# Altium PCB PCB.PcbDoc
Units mil, origin at the board's own origin, x right, y up, seen from the top; angles counter-clockwise.
Board outline 8629.96 x 1582.71 mil, 2 copper layers (Top Layer, Bottom Layer), stack 60.433 mil thick; 94 components, 71 nets, 454 pads, 92 vias.
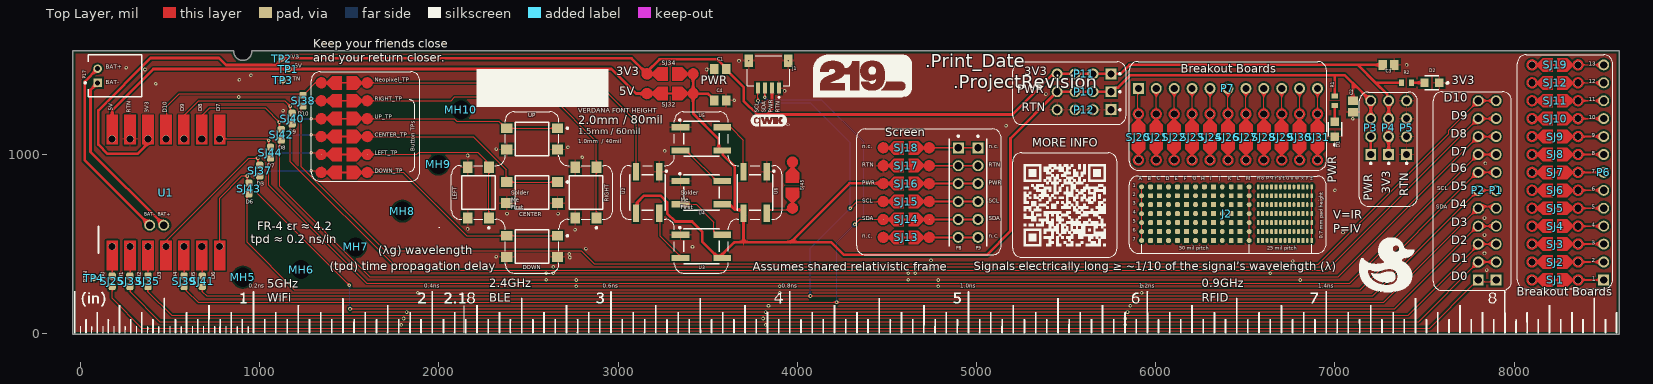
[diagram p0: Top Layer view]
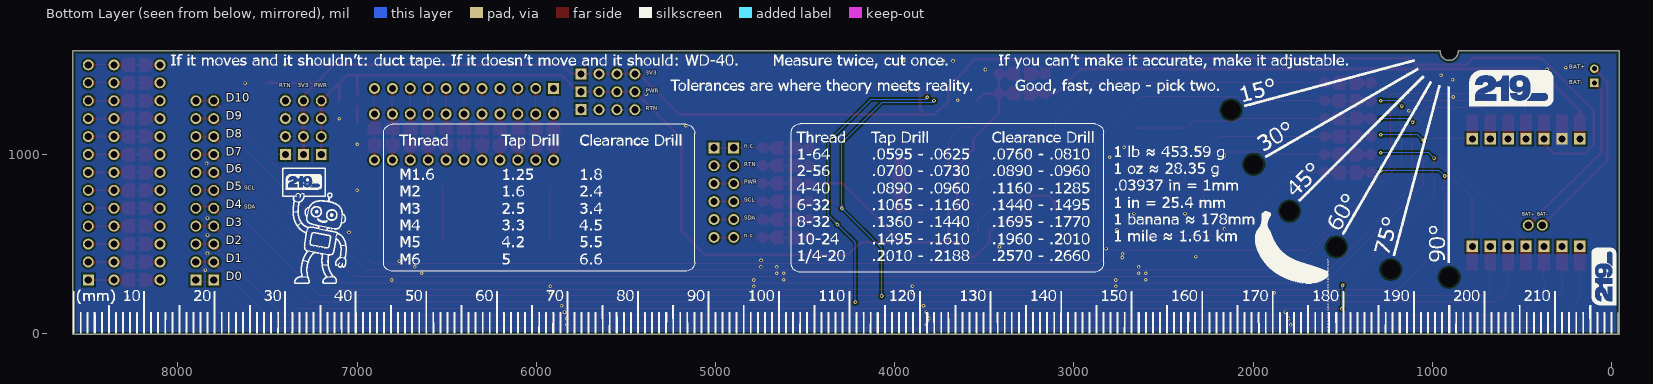
[diagram p1: Bottom Layer view, seen from below]

## Layer stack, top to bottom
Top Solder: solder mask 1.1811, Solder Resist, Dk 4
Top Layer: signal copper 0.689
Dielectric 3: core 59.0551, Dk 4.2
Bottom Layer: signal copper 0.689
Bottom Solder: solder mask 1.1811, Solder Resist, Dk 4

## Board outline
-43.32,0.03 -43.32,1574.8 cw(c-39.37,1574.8) -39.37,1578.75 851.38,1578.75 cw(c851.38,1574.8) 855.33,1574.8 ccw(c905.52,1574.8) 955.7,1574.8 cw(c959.65,1574.8) 959.71,1578.75 8582.65,1578.76 cw(c8582.68,1574.8) 8586.63,1574.8 8586.63,0 cw(c8582.68,0) 8582.68,-3.95 -39.37,-3.95 cw(c-39.37,0)

## Design rules (kind name [scope] priority, off if disabled: settings)
AssemblyTestPointUsage [InNetClass('All Nets')] p1 off:
AssemblyTestpoint [(IsPad And (OnTopLayer Or OnBottomLayer)) Or (IsVia) Or (IsPad And OnMultiLayer)] p1 off: testpointundercomponent=FALSE minsize=40 maxsize=100 preferedsize=50 minholesize=0 maxholesize=75 preferedholesize=35 testpointgrid=100 usegrid=TRUE gridoriginx=1000 gridoriginy=1000 gridtolerance=0.01 allowsidetop=TRUE allowsidebottom=TRUE
BoardOutlineClearance BoardOutlineClearance_nosilk [All And Not OnLayer('Top Overlay') And Not OnLayer('Bottom Overlay')] p1: gap=15 ignorepadtopadclearanceinfootprint=FALSE
Clearance Clearance_analog [InNetClass('Analog')] p1: gap=5 ignorepadtopadclearanceinfootprint=FALSE
Clearance Clearance_digital [InNetClass('Digital')] p2: gap=5 ignorepadtopadclearanceinfootprint=FALSE
Clearance Clearance_polygon [InPolygon] p3: gap=10 ignorepadtopadclearanceinfootprint=FALSE
Clearance Clearance_Vias_to_Pads [(IsVia) vs (IsPad)] p4: gap=10 ignorepadtopadclearanceinfootprint=FALSE
Clearance [All] p5: gap=5 ignorepadtopadclearanceinfootprint=FALSE
DiffPairsRouting [All] p1: maxlimit=100 minlimit=6 mostfreqgap=10 toplayer_minwidth=6 toplayer_maxwidth=100 toplayer_prefwidth=10 bottomlayer_minwidth=6 bottomlayer_maxwidth=100 bottomlayer_prefwidth=10 maxuncoupledlength=500
FabricationTestPointUsage TestPointUsage [InNetClass('All Nets')] p1 off: valid=0 allowmultiple=FALSE
FabricationTestpoint Testpoint [(IsPad And (OnTopLayer Or OnBottomLayer)) Or (IsVia) Or (IsPad And OnMultiLayer)] p1 off: side=3 testpointundercomponent=TRUE minsize=30 maxsize=100 preferedsize=60 minholesize=0 maxholesize=50 preferedholesize=32 testpointgrid=25 allowsidetop=TRUE allowsidebottom=TRUE usegrid=TRUE gridoriginx=1000 gridoriginy=1000 gridtolerance=0.01
Height [All] p1 off: minheight=0 maxheight=1000 prefheight=500
HoleSize [All] p1: absolutevalues=TRUE maxlimit=500 minlimit=8 maxpercent=80.000 minpercent=20.000
MinimumAnnularRing [All] p1: minimumring=5
MinimumSolderMaskSliver [All] p1 off: minsoldermaskwidth=5
PasteMaskExpansion [All] p1: expansion=-1
PermittedLayers [All] p1: toplayerpermitted=TRUE bottomlayerpermitted=TRUE
PolygonConnect PolygonConnect_Via [All vs IsVia] p1: connectstyle=Direct reliefconductorwidth=10 reliefentries=4 polygonreliefangle="90 Angle" airgapwidth=10
PolygonConnect [All] p2: connectstyle=Relief reliefconductorwidth=10 reliefentries=4 polygonreliefangle="90 Angle" airgapwidth=10
RoutingVias [All] p1: holewidth=12 width=22 viastyle="Through Hole" minholewidth=8 minwidth=18 maxholewidth=500 maxwidth=700
SilkToSilkClearance [All] p1 off: silktosilkclearance=1
SilkToSolderMaskClearance SilkscreenOverComponentPads [IsPad] p1: minsilkscreentomaskgap=3 clearancetoexposedcopper=TRUE
SolderMaskExpansion SolderMaskExpansion_RequireTentedVias [IsVia] p1: expansion=4 istentingtop=TRUE
SolderMaskExpansion [All] p2 off: expansion=1 istentingtop=FALSE
SupplyNets "Schematic Supply Nets_2" [InNet('PWR')] p1: voltage=0.000
SupplyNets "Schematic Supply Nets_3" [InNet('RTN')] p2: voltage=0.000
SupplyNets "Schematic Supply Nets_1" [InNet('3V3')] p3: voltage=0.000
SupplyNets "Schematic Supply Nets" [InNet('5V')] p4: voltage=0.000
UnRoutedNet [All] p1: checkbadconnections=TRUE
UnpouredPolygon [All] p1: allowunpoured=TRUE allowshelved=TRUE
Width [All] p1: maxlimit=1000 minlimit=5 preferedwidth=6 checkconnectedcopper=TRUE
17 further rules are at their usual default settings.

## Classes and differential pairs
component class U_Main: C1 C2 C3 C4 CENTER CENTER_TP D1 D2 DOWN DOWN_TP J1 J2 LEFT LEFT_TP Neopixel_TP P1 P2 P3 P4 P5 P6 P7 P8 P9 P10 P11 P12 P17 R1 R2 RIGHT RIGHT_TP SJ1 SJ2 SJ3 SJ4 SJ5 SJ6 SJ7 SJ8 SJ9 SJ10 SJ11 SJ12 SJ13 SJ14 SJ15 SJ16 SJ17 SJ18 SJ19 SJ20 SJ21 SJ22 SJ23 SJ24 SJ25 SJ26 SJ27 SJ28 SJ29 SJ30 SJ31 SJ32 SJ33 SJ34 SJ35 SJ37 SJ38 SJ39 SJ40 SJ41 SJ42 SJ43 SJ44 SJ45 TP1 TP2 TP3 TP4 U1 U2 U3 U4 U5 U6 UP UP_TP
component class U_Top: MH5 MH6 MH7 MH8 MH9 MH10

## Components (designator, comment, footprint, x,y, rotation, side; value= is the part's Value field where it differs from the comment)
C1 "Multilayer Ceramic Capacitor, 1 uF, 50 V, ± 10%, X7R, 0805" FP-GRM21B-0_15-IPC_B 3570.06,1477.49 r180 top value=1uF
C2 "Multilayer Ceramic Capacitor, 1 uF, 50 V, ± 10%, X7R, 0805" FP-GRM21B-0_15-IPC_B 7100,1267.47 r270 top value=1uF
C3 "Multilayer Ceramic Capacitor, 1 uF, 50 V, ± 10%, X7R, 0805" FP-GRM21B-0_15-IPC_B 7300,1500 r0 top value=1uF
C4 "Multilayer Ceramic Capacitor, 1 uF, 50 V, ± 10%, X7R, 0805" FP-GRM21B-0_15-IPC_B 3570.06,1302.45 r0 top value=1uF
CENTER "TL3305AF260QG" FP-TL3305AF260QG-MFG 2519.68,787.4 r180 top
CENTER_TP "SJ CUSTOM SMD NC" "SJ CUSTOM SMD NC" 1471.63,1100 r0 top net-tie
D1 "LSR976-NR-1" FP-LS_R976-MFG 7000,1141.34 r90 top
D2 "LYR976-PS-36" FP-LS_R976-MFG 7541.34,1400 r180 top
DOWN "TL3305AF260QG" FP-TL3305AF260QG-MFG 2519.68,487.4 r180 top
DOWN_TP "SJ CUSTOM SMD NC" "SJ CUSTOM SMD NC" 1471.63,900 r0 top net-tie
J1 "QWIIC JST CONNECTOR" SPARKFUN_PRT-14417 3839.06,1466.46 r180 top
J2 "ProtoPads" "New footprint 1" 5921.45,819.75 r0 top
LEFT "TL3305AF260QG" FP-TL3305AF260QG-MFG 2219.68,787.4 r90 top
LEFT_TP "SJ CUSTOM SMD NC" "SJ CUSTOM SMD NC" 1471.63,1000 r0 top net-tie
MH5 "2.7mm hole" "2.7mm hole (no keepout)" 905.53,314.97 r0 top locked
MH6 "2.7mm hole" "2.7mm hole (no keepout)" 1231.51,357.88 r0 top locked
MH7 "2.7mm hole" "2.7mm hole (no keepout)" 1535.45,483.87 r0 top locked
MH8 "2.7mm hole" "2.7mm hole (no keepout)" 1796.47,683.87 r0 top locked
MH9 "2.7mm hole" "2.7mm hole (no keepout)" 1996.47,944.89 r0 top locked
MH10 "2.7mm hole" "2.7mm hole (no keepout)" 2122.46,1248.83 r0 top locked
Neopixel_TP "SJ CUSTOM SMD NC" "SJ CUSTOM SMD NC" 1471.63,1400 r0 top net-tie
P1 "HDR 11 POS 100mil 2.54mm" "HDR 11 POS 100mil 2.54mm no outline" 7900,300 r90 top
P2 "HDR 11 POS 100mil 2.54mm" "HDR 11 POS 100mil 2.54mm no outline" 7800,300 r90 top
P3 "HDR 04 POS 100mil 2.54mm" "HDR 04 POS 100mil 2.54mm - No Outline" 7200,1000 r90 top
P4 "HDR 04 POS 100mil 2.54mm" "HDR 04 POS 100mil 2.54mm - No Outline" 7300,1000 r90 top
P5 "HDR 04 POS 100mil 2.54mm" "HDR 04 POS 100mil 2.54mm - No Outline" 7400,1000 r90 top
P6 "HDR 13 POS 100mil 2.54mm" "HDR 13 POS 100mil 2.54mm No Outline" 8500,300 r90 top
P7 "HDR 11 POS 100mil 2.54mm" "HDR 11 POS 100mil 2.54mm no outline" 5903.18,1368.79 r0 top
P8 "HDR 06 POS 100mil 2.54mm" "HDR 06 POS 100mil 2.54mm" 4898.43,1037.4 r270 top
P9 "HDR 06 POS 100mil 2.54mm" "HDR 06 POS 100mil 2.54mm" 5008.27,1037.4 r270 top
P10 "HDR 04 POS 100mil 2.54mm" "HDR 04 POS 100mil 2.54mm - No Outline" 5750,1350 r180 top
P11 "HDR 04 POS 100mil 2.54mm" "HDR 04 POS 100mil 2.54mm - No Outline" 5750,1450 r180 top
P12 "HDR 04 POS 100mil 2.54mm" "HDR 04 POS 100mil 2.54mm - No Outline" 5750,1250 r180 top
P17 "S2B-PH-K-S(LF)(SN)" JST-S2B-PH-K-S_V 191.94,1439.47 r90 top
R1 "SMD Chip Resistor, 330 Ohm, ± 1%, 100 mW, 0603" RESC1608X55X25NL10T15 7000,1300 r270 top value=330R
R2 "SMD Chip Resistor, 330 Ohm, ± 1%, 100 mW, 0603" RESC1608X55X25NL10T15 7400,1400 r0 top value=330R
RIGHT "TL3305AF260QG" FP-TL3305AF260QG-MFG 2819.68,787.4 r90 top
RIGHT_TP "SJ CUSTOM SMD NC" "SJ CUSTOM SMD NC" 1471.63,1300 r0 top net-tie
SJ1 "SJ CUSTOM and TH NC" "SJ CUSTOM and TH NC" 8228.37,300 r0 top net-tie
SJ2 "SJ CUSTOM and TH NC" "SJ CUSTOM and TH NC" 8228.37,400 r0 top net-tie
SJ3 "SJ CUSTOM and TH NC" "SJ CUSTOM and TH NC" 8228.37,500 r0 top net-tie
SJ4 "SJ CUSTOM and TH NC" "SJ CUSTOM and TH NC" 8228.37,600 r0 top net-tie
SJ5 "SJ CUSTOM and TH NC" "SJ CUSTOM and TH NC" 8228.37,700 r0 top net-tie
SJ6 "SJ CUSTOM and TH NC" "SJ CUSTOM and TH NC" 8228.37,800 r0 top net-tie
SJ7 "SJ CUSTOM and TH NC" "SJ CUSTOM and TH NC" 8228.37,900 r0 top net-tie
SJ8 "SJ CUSTOM and TH NC" "SJ CUSTOM and TH NC" 8228.37,1000 r0 top net-tie
SJ9 "SJ CUSTOM and TH NC" "SJ CUSTOM and TH NC" 8228.37,1100 r0 top net-tie
SJ10 "SJ CUSTOM and TH NC" "SJ CUSTOM and TH NC" 8228.37,1200 r0 top net-tie
SJ11 "SJ CUSTOM and TH NC" "SJ CUSTOM and TH NC" 8228.37,1300 r0 top net-tie
SJ12 "SJ CUSTOM and TH NC" "SJ CUSTOM and TH NC" 8228.37,1400.01 r0 top net-tie
SJ13 "SJ CUSTOM SMD NC" "SJ CUSTOM SMD NC" 4607.87,537.4 r0 top net-tie
SJ14 "SJ CUSTOM SMD NC" "SJ CUSTOM SMD NC" 4607.87,637.4 r0 top net-tie
SJ15 "SJ CUSTOM SMD NC" "SJ CUSTOM SMD NC" 4607.87,737.4 r0 top net-tie
SJ16 "SJ CUSTOM SMD NC" "SJ CUSTOM SMD NC" 4607.87,837.4 r0 top net-tie
SJ17 "SJ CUSTOM SMD NC" "SJ CUSTOM SMD NC" 4607.87,937.4 r0 top net-tie
SJ18 "SJ CUSTOM SMD NC" "SJ CUSTOM SMD NC" 4607.87,1037.4 r0 top net-tie
SJ19 "SJ CUSTOM and TH NC" "SJ CUSTOM and TH NC" 8228.37,1500.01 r0 top net-tie
SJ20 "SJ CUSTOM and TH NC" "SJ CUSTOM and TH NC" 5903.18,1097.15 r90 top net-tie
SJ21 "SJ CUSTOM and TH NC" "SJ CUSTOM and TH NC" 6003.18,1097.15 r90 top net-tie
SJ22 "SJ CUSTOM and TH NC" "SJ CUSTOM and TH NC" 6103.18,1097.15 r90 top net-tie
SJ23 "SJ CUSTOM and TH NC" "SJ CUSTOM and TH NC" 6203.18,1097.15 r90 top net-tie
SJ24 "SJ CUSTOM and TH NC" "SJ CUSTOM and TH NC" 6303.18,1097.15 r90 top net-tie
SJ25 "Solder Jumper 0603 Normally Closed" "SolderJumper SPST NC 0603" 177.47,292.56 r90 top net-tie
SJ26 "SJ CUSTOM and TH NC" "SJ CUSTOM and TH NC" 6403.18,1097.15 r90 top net-tie
SJ27 "SJ CUSTOM and TH NC" "SJ CUSTOM and TH NC" 6503.18,1097.15 r90 top net-tie
SJ28 "SJ CUSTOM and TH NC" "SJ CUSTOM and TH NC" 6603.18,1097.15 r90 top net-tie
SJ29 "SJ CUSTOM and TH NC" "SJ CUSTOM and TH NC" 6703.18,1097.15 r90 top net-tie
SJ30 "SJ CUSTOM and TH NC" "SJ CUSTOM and TH NC" 6803.18,1097.15 r90 top net-tie
SJ31 "SJ CUSTOM and TH NC" "SJ CUSTOM and TH NC" 6903.18,1097.15 r90 top net-tie
SJ32 "SJ CUSTOM SMD NC" "SJ CUSTOM SMD NC" 3290,1340 r0 top net-tie
SJ33 "Solder Jumper 0603 Normally Closed" "SolderJumper SPST NC 0603" 276,292.56 r90 top net-tie
SJ34 "SJ CUSTOM SMD NO" "SJ CUSTOM SMD NO"#1 3290,1450 r180 top net-tie
SJ35 "Solder Jumper 0603 Normally Closed" "SolderJumper SPST NC 0603" 377,292.56 r90 top net-tie
SJ37 "Solder Jumper 0603 Normally Closed" "SolderJumper SPST NC 0603" 1000.98,910 r90 top net-tie
SJ38 "Solder Jumper 0603 Normally Closed" "SolderJumper SPST NC 0603" 1240.98,1300 r270 top net-tie
SJ39 "Solder Jumper 0603 Normally Closed" "SolderJumper SPST NC 0603" 579,292.56 r90 top net-tie
SJ40 "Solder Jumper 0603 Normally Closed" "SolderJumper SPST NC 0603" 1180,1200 r270 top net-tie
SJ41 "Solder Jumper 0603 Normally Closed" "SolderJumper SPST NC 0603" 680,292.56 r90 top net-tie
SJ42 "Solder Jumper 0603 Normally Closed" "SolderJumper SPST NC 0603" 1119.02,1110 r270 top net-tie
SJ43 "Solder Jumper 0603 Normally Closed" "SolderJumper SPST NC 0603" 940.98,810 r90 top net-tie
SJ44 "Solder Jumper 0603 Normally Closed" "SolderJumper SPST NC 0603" 1059.02,1010 r270 top net-tie
SJ45 "SJ CUSTOM SMD NO" "SJ CUSTOM SMD NO"#2 3972.86,829.03 r90 top net-tie
TP1 "Testpoint 35mil SMT Round" "Testpoint Round 35mil" 1159.08,1476.57 r0 top
TP2 "Testpoint 35mil SMT Round" "Testpoint Round 35mil" 1124.19,1535.05 r0 top
TP3 "Testpoint 35mil SMT Round" "Testpoint Round 35mil" 1128.62,1413.52 r0 top
TP4 "Testpoint 35mil SMT Round" "Testpoint Round 35mil" 75,310 r0 top
U1 "Seeedstudio XIAO" "Seeeduino XIAO-Footprint-Both" 176.49,487.4 r90 top locked
U2 "1655 NeoPixel 5050 RGB LED" ADA-RGB-1655_V 3164.57,787.4 r270 top
U3 "1655 NeoPixel 5050 RGB LED" ADA-RGB-1655_V 3464.57,487.4 r0 top
U4 "1655 NeoPixel 5050 RGB LED" ADA-RGB-1655_V 3464.57,787.4 r0 top
U5 "1655 NeoPixel 5050 RGB LED" ADA-RGB-1655_V 3464.57,1087.4 r0 top
U6 "1655 NeoPixel 5050 RGB LED" ADA-RGB-1655_V 3764.57,787.4 r270 top
UP "TL3305AF260QG" FP-TL3305AF260QG-MFG 2519.68,1087.4 r180 top
UP_TP "SJ CUSTOM SMD NC" "SJ CUSTOM SMD NC" 1471.63,1200 r0 top net-tie

## Footprints (in the part's own frame and the unit in brackets; to place one, negate y for a bottom-side part, rotate by r counter-clockwise, add the part's x,y. Pads: shape width x height; smd on the part's side, far side on the other; paste and mask are expansions set on the pad)
"2.7mm hole (no keepout)" [mm]
  round 0 hole 2.7 unplated paste-2539.97: 1(0,0)
ADA-RGB-1655_V [mm] "SMD, 4-Leads, Body 5x5mm"
  rect 2.5x0.9 smd: 1(-2.95,1.65) 2(-2.95,-1.65) 3(2.95,-1.65) 4(2.95,1.65)
  silkscreen extent -3.17,-2.5 2.5,2.79, body extent -2.7,-2.5 2.7,2.5, height 1.68
FP-GRM21B-0_15-IPC_B [mil]
  rect 47.47x55.44 smd: 1(-32.53,0) 2(32.53,0)
  body extent -66,-38 66,38, height 10
FP-LS_R976-MFG [mm]
  rect 1.2x1.2 smd: 1(-1.05,0) 2(1.05,0)
  silkscreen extent -2.37,-0.97 1,0.97, body extent -1.75,-0.8 1.75,0.8, height 0.25
FP-TL3305AF260QG-MFG [mm]
  rect 1.6x1.4 smd: 1(-3.6,-1.5) 2(3.6,-1.5) 3(-3.6,1.5) 4(3.6,1.5)
  silkscreen extent -5.13,-2.37 2.37,2.37, body extent -4.5,-2.47 4.5,2.47, height 0.25
"HDR 04 POS 100mil 2.54mm - No Outline" [mm] "THD, 04-Leads, 1.55mm pad, 1.016mm hole, Pitch 2.54mm"
  rect 1.55x1.55 hole 1.016: 1(0,0)
  round 1.55 hole 1.016: 2(2.54,0) 3(5.08,0) 4(7.62,0)
  silkscreen extent -1.39,-0.13 -1.15,0.12
"HDR 06 POS 100mil 2.54mm" [mm] "THD, 06-Leads, 1.55mm pad, 1.016mm hole, Pitch 2.54mm"
  rect 1.55x1.55 hole 1.016: 1(0,0)
  round 1.55 hole 1.016: 2(2.54,0) 3(5.08,0) 4(7.62,0) 5(10.16,0) 6(12.7,0)
  silkscreen extent -1.77,-1.27 13.97,0.13
"HDR 11 POS 100mil 2.54mm no outline" [mm] "THD, 11-Leads, 1.55mm pad, 1.016mm hole, Pitch 2.54mm"
  rect 1.55x1.55 hole 1.016: 1(0,0)
  round 1.55 hole 1.016: 2(2.54,0) 3(5.08,0) 4(7.62,0) 5(10.16,0) 6(12.7,0) 7(15.24,0) 8(17.78,0) 9(20.32,0) 10(22.86,0) 11(25.394,0.002)
"HDR 13 POS 100mil 2.54mm No Outline" [mm] "THD, 13-Leads, 1.55mm pad, 1.016mm hole, Pitch 2.54mm No Outline"
  rect 1.55x1.55 hole 1.016: 1(0,0)
  round 1.55 hole 1.016: 2(2.54,0) 3(5.08,0) 4(7.62,0) 5(10.16,0) 6(12.7,0) 7(15.24,0) 8(17.78,0) 9(20.32,0) 10(22.86,0) 11(25.4,0) 12(27.94,0) 13(30.48,0)
JST-S2B-PH-K-S_V [mm] "THD, 2-Leads, Body 7.6x5.9mm, Pitch 2mm"
  rect 1.2x1.2 hole 0.7: 1(-1,2.45)
  round 1.2 hole 0.7: 2(1,2.45)
  silkscreen extent -2.95,-3.8 2.95,4.35, body extent -2.95,-3.8 2.95,3.8, height 4.8
"New footprint 1" [mm]
  oct 0.7x0.7 smd paste-2539.97 mask-0.025: 1(3.81,-7.62) 1(3.81,-6.35) 1(3.81,-5.08) 1(3.81,-3.81) 1(3.81,-2.54) 1(3.81,-1.27) 1(3.81,0) 1(7.62,-7.62) 1(7.62,-6.35) 1(7.62,-5.08) 1(7.62,-3.81) 1(7.62,-2.54) 1(7.62,-1.27) 1(7.62,0) 1(11.43,-7.62) 1(11.43,-6.35) 1(11.43,-5.08) 1(11.43,-3.81) 1(11.43,-2.54) 1(11.43,-1.27) 1(11.43,0)
  round 0.7 smd paste-2539.97 mask-0.025: 1(15.24,-7.62) 1(15.24,-6.35) 1(15.24,-5.08) 1(15.24,-3.81) 1(15.24,-2.54) 1(15.24,-1.27) 1(15.24,0) A1(0,0) A2(0,-1.27) A3(0,-2.54) A4(0,-3.81) A5(0,-5.08) A6(0,-6.35) A7(0,-7.62)
  oct 0.381x0.7 smd paste-2539.97 mask-0.025: 1(17.78,-7.62) 1(17.78,-6.35) 1(17.78,-5.08) 1(17.78,-3.81) 1(17.78,-2.54) 1(17.78,-1.27) 1(17.78,0) 1(19.685,-7.62) 1(19.685,-6.35) 1(19.685,-5.08) 1(19.685,-3.81) 1(19.685,-2.54) 1(19.685,-1.27) 1(19.685,0) 1(21.59,-7.62) 1(21.59,-6.35) 1(21.59,-5.08) 1(21.59,-3.81) 1(21.59,-2.54) 1(21.59,-1.27) 1(21.59,0) 1(23.495,-7.62) 1(23.495,-6.35) 1(23.495,-5.08) 1(23.495,-3.81) 1(23.495,-2.54) 1(23.495,-1.27) 1(23.495,0)
  rrect50% 0.7x0.7 smd paste-2539.97 mask-0.025: 2(5.08,-7.62) 2(5.08,-6.35) 2(5.08,-5.08) 2(5.08,-3.81) 2(5.08,-2.54) 2(5.08,-1.27) 2(5.08,0) 2(8.89,-7.62) 2(8.89,-6.35) 2(8.89,-5.08) 2(8.89,-3.81) 2(8.89,-2.54) 2(8.89,-1.27) 2(8.89,0) 2(12.7,-7.62) 2(12.7,-6.35) 2(12.7,-5.08) 2(12.7,-3.81) 2(12.7,-2.54) 2(12.7,-1.27) 2(12.7,0) B1(1.27,0) B2(1.27,-1.27) B3(1.27,-2.54) B4(1.27,-3.81) B5(1.27,-5.08) B6(1.27,-6.35) B7(1.27,-7.62)
  rrect50% 0.381x0.7 smd paste-2539.97 mask-0.025: 2(16.51,-7.62) 2(16.51,-6.35) 2(16.51,-5.08) 2(16.51,-3.81) 2(16.51,-2.54) 2(16.51,-1.27) 2(16.51,0) 2(18.415,-7.62) 2(18.415,-6.35) 2(18.415,-5.08) 2(18.415,-3.81) 2(18.415,-2.54) 2(18.415,-1.27) 2(18.415,0) 2(20.32,-7.62) 2(20.32,-6.35) 2(20.32,-5.08) 2(20.32,-3.81) 2(20.32,-2.54) 2(20.32,-1.27) 2(20.32,0) 2(22.225,-7.62) 2(22.225,-6.35) 2(22.225,-5.08) 2(22.225,-3.81) 2(22.225,-2.54) 2(22.225,-1.27) 2(22.225,0) 2(24.13,-7.62) 2(24.13,-6.35) 2(24.13,-5.08) 2(24.13,-3.81) 2(24.13,-2.54) 2(24.13,-1.27) 2(24.13,0)
  rect 0.7x0.7 smd paste-2539.97 mask-0.025: 3(6.35,-7.62) 3(6.35,-6.35) 3(6.35,-5.08) 3(6.35,-3.81) 3(6.35,-2.54) 3(6.35,-1.27) 3(6.35,0) 3(10.16,-7.62) 3(10.16,-6.35) 3(10.16,-5.08) 3(10.16,-3.81) 3(10.16,-2.54) 3(10.16,-1.27) 3(10.16,0) 3(13.97,-7.62) 3(13.97,-6.35) 3(13.97,-5.08) 3(13.97,-3.81) 3(13.97,-2.54) 3(13.97,-1.27) 3(13.97,0) C1(2.54,0) C2(2.54,-1.27) C3(2.54,-2.54) C4(2.54,-3.81) C5(2.54,-5.08) C6(2.54,-6.35) C7(2.54,-7.62)
  rect 0.381x0.7 smd paste-2539.97 mask-0.025: 3(17.145,-7.62) 3(17.145,-6.35) 3(17.145,-5.08) 3(17.145,-3.81) 3(17.145,-2.54) 3(17.145,-1.27) 3(17.145,0) 3(19.05,-7.62) 3(19.05,-6.35) 3(19.05,-5.08) 3(19.05,-3.81) 3(19.05,-2.54) 3(19.05,-1.27) 3(19.05,0) 3(20.955,-7.62) 3(20.955,-6.35) 3(20.955,-5.08) 3(20.955,-3.81) 3(20.955,-2.54) 3(20.955,-1.27) 3(20.955,0) 3(22.86,-7.62) 3(22.86,-6.35) 3(22.86,-5.08) 3(22.86,-3.81) 3(22.86,-2.54) 3(22.86,-1.27) 3(22.86,0)
  Top Layer lines w0.127: 0,-7.62 0,0 ; 15.24,-7.62 15.24,0 ; 24.13,-7.62 24.13,0
  silkscreen extent -1.78,-9.4 26.16,1.52, body extent 0.67,-8.22 24.98,0.48, height 1.85
RESC1608X55X25NL10T15 [mm] "Chip Resistor, 2-Leads, Body 1.60x0.80mm, IPC Medium Density"
  rect 0.7x0.9 smd: 1(-0.7,0) 2(0.7,0)
  body extent -0.85,-0.45 0.85,0.45, height 0.55
"Seeeduino XIAO-Footprint-Both" [mm]
  round 1.025 / inner round 1.478 / far side rect 1.6x1.6 hole 1 paste-0.025: 1(0,0) 2(0,-2.54) 3(0,-5.08) 4(0,-7.62) 5(0,-10.16) 6(0,-12.7) 7(0,-15.24) 8(15.24,-15.24) 9(15.24,-12.7) 10(15.24,-10.16) 11(15.24,-7.62) 12(15.24,-5.08) 13(15.24,-2.54) 14(15.24,0)
  round 1.55 hole 1.016 paste-0.025: 15(3,-7.317) 16(3,-5.317)
  Top Layer region: 18.64,-0.8 18.64,0.8 14.44,0.8 14.44,-0.8 14.44,-0.8
  Top Layer region: 18.64,-3.34 18.64,-1.74 14.44,-1.74 14.44,-3.34 14.44,-3.34
  Top Layer region: 18.64,-5.88 18.64,-4.28 14.44,-4.28 14.44,-5.88 14.44,-5.88
  Top Layer region: 18.64,-8.42 18.64,-6.82 14.44,-6.82 14.44,-8.42 14.44,-8.42
  Top Layer region: 18.64,-10.96 18.64,-9.36 14.44,-9.36 14.44,-10.96 14.44,-10.96
  Top Layer region: 18.64,-13.5 18.64,-11.9 14.44,-11.9 14.44,-13.5 14.44,-13.5
  Top Layer region: 18.64,-16.04 18.64,-14.44 14.44,-14.44 14.44,-16.04 14.44,-16.04
  Top Layer region: -3.4,-14.44 -3.4,-16.04 0.8,-16.04 0.8,-14.44 0.8,-14.44
  Top Layer region: -3.4,-11.9 -3.4,-13.5 0.8,-13.5 0.8,-11.9 0.8,-11.9
  Top Layer region: -3.4,-9.36 -3.4,-10.96 0.8,-10.96 0.8,-9.36 0.8,-9.36
  Top Layer region: -3.4,-6.82 -3.4,-8.42 0.8,-8.42 0.8,-6.82 0.8,-6.82
  Top Layer region: -3.4,-4.28 -3.4,-5.88 0.8,-5.88 0.8,-4.28 0.8,-4.28
  Top Layer region: -3.4,-1.74 -3.4,-3.34 0.8,-3.34 0.8,-1.74 0.8,-1.74
  Top Layer region: -3.4,0.8 -3.4,-0.8 0.8,-0.8 0.8,0.8 0.8,0.8
  body extent -1.27,-18.28 16.63,4.32, height 4.5
"SJ CUSTOM and TH NC" [mm]
  round 1.045 / inner round 1.397 / far side round 1.55 hole 1.02 mask-0.762: 1(-3.26,0) 2(3.26,0)
  Top Layer region: 2.507,0.182 1.736,0.953 0.339,0.953 0.339,-0.953 1.736,-0.953 2.507,-0.182 2.678,-0.512 2.983,-0.724 3.352,-0.77 3.7,-0.639 3.946,-0.361 4.035,0 3.946,0.361 3.7,0.639 3.352,0.77 2.983,0.724 2.678,0.512 2.507,0.182
  Top Layer region: -2.507,-0.182 -1.736,-0.953 -0.339,-0.953 -0.339,0.953 -1.736,0.953 -2.507,0.182 -2.678,0.512 -2.983,0.724 -3.352,0.77 -3.7,0.639 -3.946,0.361 -4.035,0 -3.946,-0.361 -3.7,-0.639 -3.352,-0.77 -2.983,-0.724 -2.678,-0.512 -2.507,-0.182
  Top Layer lines w0.254: -0.381,0 0.381,0
"SJ CUSTOM SMD NC" [mil]
  round 1 smd paste-99999 mask-20: 1(-128.36,0) 2(128.37,0)
  Top Layer region: 98.71,7.16 68.37,37.5 13.37,37.5 13.37,-37.5 68.37,-37.5 98.71,-7.16 105.45,-20.14 117.45,-28.49 131.97,-30.3 145.66,-25.14 155.37,-14.2 158.88,0 155.37,14.2 145.66,25.14 131.97,30.3 117.45,28.49 105.45,20.14 98.71,7.16
  Top Layer region: -98.71,-7.16 -68.36,-37.5 -13.36,-37.5 -13.36,37.5 -68.36,37.5 -98.71,7.16 -105.45,20.14 -117.45,28.49 -131.97,30.3 -145.66,25.14 -155.37,14.2 -158.88,0 -155.37,-14.2 -145.66,-25.14 -131.97,-30.3 -117.45,-28.49 -105.45,-20.14 -98.71,-7.16
  Top Layer lines w10: -15,0 15,0
"SJ CUSTOM SMD NO"#1 [mil]
  round 1 smd paste-99999 mask-20: 1(-128.37,0) 2(128.36,0)
  Top Layer region: -98.71,-7.16 -68.37,-37.5 -13.37,-37.5 -13.37,37.5 -68.37,37.5 -98.71,7.16 -105.45,20.14 -117.45,28.49 -131.97,30.3 -145.66,25.14 -155.37,14.2 -158.88,0 -155.37,-14.2 -145.66,-25.14 -131.97,-30.3 -117.45,-28.49 -105.45,-20.14 -98.71,-7.16
  Top Layer region: 98.71,7.16 68.36,37.5 13.36,37.5 13.36,-37.5 68.36,-37.5 98.71,-7.16 105.45,-20.14 117.45,-28.49 131.97,-30.3 145.66,-25.14 155.37,-14.2 158.88,0 155.37,14.2 145.66,25.14 131.97,30.3 117.45,28.49 105.45,20.14 98.71,7.16
"SJ CUSTOM SMD NO"#2 [mil]
  round 1 smd mask-20: 1(-128.37,0) 2(128.37,0)
  Top Layer region: 98.71,7.16 68.37,37.5 13.37,37.5 13.37,-37.5 68.37,-37.5 98.71,-7.16 105.45,-20.14 117.45,-28.49 131.97,-30.3 145.66,-25.14 155.37,-14.2 158.88,0 155.37,14.2 145.66,25.14 131.97,30.3 117.45,28.49 105.45,20.14 98.71,7.16
  Top Layer region: -98.71,-7.16 -68.37,-37.5 -13.37,-37.5 -13.37,37.5 -68.37,37.5 -98.71,7.16 -105.45,20.14 -117.45,28.49 -131.97,30.3 -145.66,25.14 -155.37,14.2 -158.88,0 -155.37,-14.2 -145.66,-25.14 -131.97,-30.3 -117.45,-28.49 -105.45,-20.14 -98.71,-7.16
"SolderJumper SPST NC 0603" [mil] "SolderJumper SPST NC 0603"
  rrect50% 40x40 smd paste-50: 1(-30,0.98) 2(30,0.98)
  Top Layer region: -11,4 -11,-2 11,-2 11,4
SPARKFUN_PRT-14417 [mm]
  rect 0.6x1.55 smd: 1(-1.5,2.45) 2(-0.5,2.45) 3(0.5,2.45) 4(1.5,2.45)
  rect 1.2x1.8 smd: S1(-2.8,-1.425) S2(2.8,-1.425)
  silkscreen extent -3,-2.12 3,3.85, body extent -3,-2.12 3,2.83, height 3.25
"Testpoint Round 35mil" [mil] "Testpoint Round 35mil"
  round 35 smd paste-393.7: 1(0,0)

## Part data
C1 C2 C3 C4: library part CMP-001-00115-11, "Multilayer Ceramic Capacitor, 1 uF, 50 V, ± 10%, X7R, 0805 [2012 Metric]", Case Code (Imperial)=0805, Case Code (Metric)=2012, Dielectric=X7R, Max Operating Temperature=125°C, Min Operating Temperature=-55°C, Package Quantity=10000, Ratings=AEC-Q200, Tolerance=10%, Voltage Rating=50V, Case/Package=0805, Height=1.25mm, Length=0.079inch, Mounting Technology="Surface Mount", Packaging="Tape and Reel", RoHS Compliant=Yes, Series=GCM, Termination=SMD/SMT, Thickness=0.055inch, Voltage Rating (DC)=50V, Weight=0.000335oz, Width=0.049inch
CENTER DOWN LEFT RIGHT UP: library part CMP-011-00020-2, "Keypad Switch, 1 Switches, SPST, Momentary-tactile, 0.05A, 12VDC, 2.45N, Solder Terminal, Surface Mount-straight", RoHS Compliant=Yes
CENTER_TP DOWN_TP LEFT_TP Neopixel_TP RIGHT_TP SJ13 SJ14 SJ15 SJ16 SJ17 SJ18 SJ32 UP_TP: library part CMP-00056-3, "Normally closed custom pad surface mount"
D1: library part CMP-007-00039-2, "0805 Single Color LED, Super Red, Colorless Diffused, 1.3mm", Forward Voltage=2.5V, Max Operating Temperature=85°C, Min Operating Temperature=-30°C, Mounting Technology="Surface Mount", Pins=2, RoHS Compliant=Yes
D2: library part CMP-007-00044-2, "0805 Single Color LED, Yellow, Colorless Diffused, 1.3mm", Forward Voltage=2.5V, Max Operating Temperature=85°C, Min Operating Temperature=-30°C, Mounting Technology="Surface Mount", Pins=2, RoHS Compliant=Yes
J1: library part CMP-00057-2, "QWIIC JST CONNECTOR - SMD 4-PIN", Package=None, Check_prices=https://www.snapeda.com/parts/PRT-14417/SparkFun+Electronics/view-part/?ref=eda, Component Type=Standard, Design Item ID=PRT-14417, MF="SparkFun Electronics", MP=PRT-14417, Pin Count=4, SnapEDA_Link=https://www.snapeda.com/parts/PRT-14417/SparkFun+Electronics/view-part/?ref=snap, Source=PRT-14417.SchLib
J2: library part CMP-00059-3, "Soldermask defined 27 x 7 SMT Pads Array Solder Mask Defined 50 mil and 25 mil pitch 0.7mm pad"
MH5 MH6 MH7 MH8 MH9 MH10: library part CMP-00052-1, "2.7mm hole (no keepout) M2.5 tight", Component Type="Standard (No BOM)", Created By=Kylee, Pin Count=0
P1 P2 P7: library part CMP-00053-2
P3 P4 P5 P10 P11 P12: library part CMP-00041-2
P6: library part CMP-00055-1
P8 P9: library part CMP-00040-1
P17: library part CMP-002-00030-3, "Header for PCB; pitch 2.00mm; 2-contacts; THT; male; side entry; 100V/2A", Case/Package=S2B-PH-K-S, Color=Natural,White, Contact Resistance=20mR, Current Rating=2A, Flammability Rating="UL94 V-0", Housing Color=White, Insulation Resistance=1GR, Manufacturer="Japan Solderless Terminals", Max Operating Temperature=85°C, Max Voltage Rating (AC)=100V, Min Operating Temperature=-25°C, Package Description="Male Header, Pitch 2 mm, 1 x 2 Position, Height 4.8 mm, Tail Length 3.4 mm", Connector Type=Header, Contact Material=Brass,Tin,Bronze, Contact Mating Length=0.13inch, Contact Plating=Tin,Copper, Contact Type="Male Pin", Datasheet URL=http://www.jst-mfg.com/product/pdf/eng/ePH.pdf, Datasheet Version=Dec-12, Depth=7.6mm, Fastening Type=Detent, Gender=Male, Height=9.4mm, Housing Material=Polyamide, Lead Free="Lead Free", Lead Pitch=2mm, Length=5.9mm, Max Current Rating=2A, Max Voltage Rating (DC)=100V, Mounting Technology="Through Hole", Number of Contacts=2, Number of Poles=2, Number of Positions=2, Number of Rows=1, Orientation="Right Angle", Package Reference=S2B-PH-K-S, Packaging=Bulk, Pins=2, Pitch=2mm, Reach SVHC Compliant=No, RoHS Compliant=Unknown, Series=PH, Termination=Solder, Voltage Rating=100V, Voltage Rating (AC)=100V, Width=4.5mm, Working Voltage=100V
R1 R2: library part CMP-009-00273-5, "SMD Chip Resistor, 330 Ohm, ± 1%, 100 mW, 0603 [1608 Metric], Thick Film, General Purpose", Case Code (Imperial)=0603, Case Code (Metric)=1608, ESR (Equivalent Series Resistance)=800mR, Max Operating Temperature=155°C, Max Power Dissipation=100mW, Min Operating Temperature=-55°C, Package Quantity=1, Resistance Tolerance=1%, Resistor Type="Thick Film", Temperature Coefficient=100ppm/°C, Voltage Rating=50V, Case/Package=0603, Depth=0.8mm, Features="Moisture Resistant", Height=0.45mm, Lead Free="Lead Free", Length=1.6mm, Number of Terminations=2, Packaging="Tape and Reel", Pins=2, Power Rating=100mW, Reach SVHC Compliant=No, RoHS Compliant=Yes, Series=RC, Technology="THICK FILM", Termination=SMD/SMT, Tolerance=1%, Voltage Rating (AC)=50V, Voltage Rating (DC)=50V, Width=0.8mm
SJ1 SJ2 SJ3 SJ4 SJ5 SJ6 SJ7 SJ8 SJ9 SJ10 SJ11 SJ12 SJ19 SJ20 SJ21 SJ22 SJ23 SJ24 SJ26 SJ27 SJ28 SJ29 SJ30 SJ31: library part CMP-00027-10, "Normally closed custom pad and TH pads"
SJ25 SJ33 SJ35 SJ37 SJ38 SJ39 SJ40 SJ41 SJ42 SJ43 SJ44: library part CMP-090-000001-1, Design Item ID="Solder Jumper 0603 Normally Closed", Source="Solder Jumper.SchLib"
SJ34 SJ45: library part CMP-00060-2, "Normally open custom pad SMD pads"
TP1 TP2 TP3 TP4: library part CMP-075-000017-1, Manufacturer=N/A, Created By=Miguel, Design Item ID="Testpoint 35mil SMT Round", Do Not Populate="Do Not Populate", MPN=N/A, Source=Testpoint.SchLib
U1: library part CMP-00050-3, "Seeed studio XIAO series dev boards"
U2 U3 U4 U5 U6: library part CMP-007-00001-7, "NeoPixel 5050 RGB LED with Integrated Driver Chip - 10 Pack", Case/Package=1655, Color=Blue,Green,Red, Manufacturer="Adafruit Industries", Max Operating Temperature=85°C, Min Operating Temperature=-40°C, Package Description="4-Pin Surface Mount Device, Body 5 x 5 mm", Datasheet URL=http://datasheet.octopart.com/ADA1655-Adafruit-Industries-datasheet-32028139.pdf, Datasheet Version=May-13, Height=1.6mm, Interface=Serial, Length=5mm, Manufacturer URL=https://www.adafruit.com/, Mounting Technology="Surface Mount", Number of LEDs=10, Package Reference=1655, RoHS Compliant=True, Series=Neopixel, Width=5mm

## Via types
v1: diameter 20, hole 10, Top Layer to Bottom Layer, tented both sides, 90 vias
v2: diameter 18.03, hole 8, Top Layer to Bottom Layer, tented both sides, 2 vias

## Nets (pads, with @x,y where several pads share a name; then routed paths per layer and width w, separated by ;. In a path a pad name is that pad's centre, name@x,y a point inside that pad or via, vN(x,y) a via of type N, cw(c..) or ccw(c..) an arc to the next point about the centre after c; other vN are vias at no path point)
3V3: C1.1 C3.1 J1.2 P4.1 P4.2 P4.3 P4.4 P11.1 P11.2 P11.3 P11.4 R2.1 SJ34.2 TP2.1 U1.12 | length 9095.3
  Top Layer w15: U1.12 376.49,1061.64 318.77,1003.92 151.1,1003.92 99.41,1055.61 99.41,1246.24 391.52,1538.35 773.03,1538.35 811.74,1499.64 1091.81,1499.64 1124.19,1532.01 TP2.1 1125.43,1536.29 3075.35,1536.29 SJ34.2 3161.63,1461.63 3230.87,1530.87 3553.28,1530.87 3575.75,1508.4 3575.75,1508.32 3602.59,1481.47 3602.59,1473.5 3647.51,1428.58 ; 3647.56,1428.58 3700.26,1375.88 3700.26,1299.74 3776.78,1223.22 3829.11,1223.22 ; J1.2 3858.74,1252.85 3829.11,1223.22 ; C3.1 7127.93,1500 ; P4.1 P4.2 P4.3 P4.4 7291.48,1308.52 7291.48,1336.45 7227.93,1400 ; R2.1@7364.57,1400 7227.93,1400 ; 3829.11,1223.22 5201.48,1223.22 5419.45,1441.19 5441.19,1441.19 P11.4 P11.3 P11.2 P11.1 5803.77,1450 5853.77,1500 7127.93,1500 ; 7127.93,1500 7227.93,1400
5V: SJ32.1 TP1.1 U1.14 | length 3296.1
  Top Layer w15: U1.14 176.49,1246.49 406.57,1476.57 TP1.1 2963.43,1476.57 3100,1340 SJ32.1
BAT+: P17.1 U1.15 | length 980.2
  Top Layer w15: P17.1 55.99,1360.62 55.99,1014.08 U1.15
BAT-: P17.2 U1.16 | length 1053
  Top Layer w15: P17.2 23.81,1407.18 23.81,967.52 U1.16
CENTER_TP: CENTER_TP.1 SJ44.1 U1.8 | length 626.4
  Top Layer w5: U1.8 1039.57,1087.4 1046.97,1080 v1(1050,1080) SJ44.1@1050,1040 ; v1(1287.07,1110) 1333.27,1110 CENTER_TP.1
  Bottom Layer w5: v1(1050,1080) 1080,1110 v1(1287.07,1110)
D0: P1.1 P2.1 SJ25.1 | length 7977.5
  Top Layer w5: SJ25.1@176.49,262.38 176.49,197.14 342.87,30.75 7528.08,30.75 7769.31,271.99 7771.99,271.99 P2.1
  Top Layer w6: P2.1 7810.06,289.94 7889.94,289.94 P1.1
D1: P1.2 P2.2 SJ33.1 | length 7864.9
  Top Layer w5: SJ33.1 276.96,260.61 276.96,233.05 443.26,66.75 7466.75,66.75 7795.6,395.6 P2.2@7800,395.6
  Top Layer w6: P2.2@7800,394.97 7805.03,400 P1.2 ; P2.2@7800,395.6 P2.2
D2: P1.3 P2.3 SJ35.1 | length 7775.6
  Top Layer w5: SJ35.1 376.02,235 508.26,102.75 7408.48,102.75 P2.3@7800,494.27
  Top Layer w6: P2.3 7800,494.97 7805.03,500 P1.3
D3: P1.4 P2.4 SJ37.1 | length 7546.7
  Top Layer w5: SJ37.1@990,880 990,780 v1(1500,270) ; v1(1503.67,138.29) 7333.66,138.29 7790.96,595.6 P2.4@7800,595.6
  Top Layer w6: P2.4@7800,594.97 7805.03,600 P1.4 ; P2.4@7800,595.6 P2.4
  Bottom Layer w5: v1(1500,270) 1501.84,268.16 1501.84,140.13 v1(1503.67,138.29)
D6: P1.7 P2.7 SJ43.1 | length 7625.5
  Top Layer w5: SJ43.1@930,780 929.02,779.02 929.02,510.98 1193.75,246.25 7140.43,246.25 7789.77,895.6 P2.7@7800,895.6
  Top Layer w6: P2.7@7800,894.97 7805.03,900 P1.7 ; P2.7@7800,895.6 P2.7
D7: P1.8 P2.8 SJ44.2 | length 7524.6
  Top Layer w5: SJ44.2@1050,980 1050.98,979.02 1050.98,829.02 1598.25,281.75 7081.75,281.75 P2.8
  Top Layer w6: P2.8 P1.8
D8: P1.9 P2.9 SJ42.2 | length 7583.8
  Top Layer w5: SJ42.2@1110,1080 1110.98,1079.02 1110.98,822.56 1614.79,318.75 7018.75,318.75 7795.6,1095.6 P2.9@7800,1095.6
  Top Layer w6: P2.9@7800,1094.97 7805.03,1100 P1.9 ; P2.9@7800,1095.6 P2.9
D9: P1.10 P2.10 SJ40.2 | length 7545.1
  Top Layer w5: SJ40.2@1170.98,1170 1170.98,959.02 1768.79,361.21 1920.46,361.21 1926.92,354.75 6954.75,354.75 7795.6,1195.6 P2.10@7800,1195.6
  Top Layer w6: P2.10@7800,1194.97 7805.03,1200 P1.10 ; P2.10@7800,1195.6 P2.10
D10: P1.11 P2.11 SJ38.2 | length 7621.5
  Top Layer w5: SJ38.2@1231.97,1270 1230.98,1269.02 1230.98,932.29 1699.87,463.41 2794.76,463.41 2867.91,390.25 6685.35,390.25 6688.1,387.5 6906.26,387.5 7634.79,1116.03 7634.79,1134.66 P2.11
  Top Layer w6: P2.11 P1.11
DOWN_TP: DOWN_TP.1 SJ43.2 U1.7 | length 943.6
  Top Layer w5: U1.7 776.49,756.49 900,880 v1(930,880) SJ43.2@930,840 ; v1(1287.07,910) 1323.42,910 1333.42,900 DOWN_TP.1
  Bottom Layer w5: v1(930,880) 960,910 v1(1287.07,910)
I2C.SCL: J1.4 P1.6 P2.6 SJ15.1 SJ41.1 | length 9328.8
  Top Layer w5: SJ41.1 679.02,235 703.63,210.39 v1(4072.87,210.39) 7210.39,210.39 P2.6 ; J1.4 3780.39,1369.61 v1(3780.39,1300.68) ; v1(4295,700) 4332.4,737.4 SJ15.1
  Top Layer w6: P2.6 7889.94,800 P1.6@7894.97,794.97
  Bottom Layer w5: v1(3780.39,1300.68) 3791.84,1289.24 4071.59,1289.24 4295,1065.83 v1(4295,700) 4072.87,477.87 v1(4072.87,210.39)
I2C.SDA: J1.3 P1.5 P2.5 SJ14.1 SJ39.1 | length 9423.9
  Top Layer w5: SJ39.1 590.25,250.33 590.25,240.04 655.54,174.75 7272.72,174.75 7797.97,700 P2.5 ; v1(4320,610) 4347.4,637.4 SJ14.1
  Top Layer w6: v1(3818.82,1318.89) 3818.82,1369.44 J1.3 ; P2.5 7809.66,709.66 7890.35,709.66 P1.5
  Bottom Layer w5: v1(4219.13,175.05) 4219.13,509.13 v1(4320,610)
  Bottom Layer w6: v1(3818.82,1318.89) 3831.32,1306.38 4133.62,1306.38 4370,1070 4370,660 v1(4320,610)
LEFT_TP: LEFT_TP.1 SJ37.2 U1.4 | length 1144.4
  Top Layer w5: U1.4 476.49,516.49 940,980 v1(990,980) SJ37.2@990,940 ; v1(1287.07,1010) 1333.27,1010 LEFT_TP.1
  Bottom Layer w5: v1(990,980) 1020,1010 v1(1287.07,1010)
Neopixel_TP: Neopixel_TP.1 SJ38.1 U1.11 | length 1113.7
  Top Layer w5: U1.11 480,1090.91 480,1268.19 551.81,1340 1230.98,1340 1230.98,1330.98 1231.97,1330 1244.84,1342.87 1252.87,1342.87 1310,1400 Neopixel_TP.1
NetCENTER_1: CENTER.1 CENTER.2 CENTER_TP.2 | length 1205.1
  Top Layer w6: CENTER_TP.2 2190.44,1100 2375.44,915 2375.44,848.97 CENTER.2 CENTER.1
NetD1_2: D1.2 R1.2 | length 81.9
  Top Layer w15: D1.2 R1.2@7000,1264.57
NetD2_2: D2.2 R2.2 | length 64.6
  Top Layer w15: R2.2@7435.43,1400 D2.2
NetDOWN_1: DOWN.1 DOWN.2 DOWN_TP.2 | length 1207.9
  Top Layer w6: DOWN_TP.2 1800.59,900 2154.13,546.46 DOWN.2 DOWN.1
NetLEFT_1: LEFT.1 LEFT.2 LEFT_TP.2 | length 1016.9
  Top Layer w6: LEFT_TP.2 1877.23,1000 1889.56,1012.34 2217.66,1012.34 2263.88,966.12 2263.88,949.2 2281.34,931.74 LEFT.2 LEFT.1
NetNeopixel_TP_2: Neopixel_TP.2 U2.2 | length 1889.5
  Top Layer w6: Neopixel_TP.2 2883.46,1400 3100,1183.46 3100,884.25 U2.2@3099.61,883.86
NetP6_1: P6.1 SJ1.2 | length 143.3
  Top Layer w10: SJ1.2 P6.1
NetP6_2: P6.2 SJ2.2 | length 143.3
  Top Layer w10: SJ2.2 P6.2
NetP6_3: P6.3 SJ3.2 | length 143.3
  Top Layer w10: SJ3.2 P6.3
NetP6_4: P6.4 SJ4.2 | length 143.3
  Top Layer w10: SJ4.2 P6.4
NetP6_5: P6.5 SJ5.2 | length 143.3
  Top Layer w10: SJ5.2 P6.5
NetP6_6: P6.6 SJ6.2 | length 143.3
  Top Layer w10: SJ6.2 P6.6
NetP6_7: P6.7 SJ7.2 | length 143.3
  Top Layer w10: SJ7.2 P6.7
NetP6_8: P6.8 SJ8.2 | length 143.3
  Top Layer w10: SJ8.2 P6.8
NetP6_9: P6.9 SJ9.2 | length 143.3
  Top Layer w10: SJ9.2 P6.9
NetP6_10: P6.10 SJ10.2 | length 143.3
  Top Layer w10: SJ10.2 P6.10
NetP6_11: P6.11 SJ11.2 | length 143.3
  Top Layer w6: SJ11.2 SJ11.2@8356.96,1299.77
  Top Layer w10: SJ11.2@8356.96,1299.77 P6.11@8499.91,1299.77
NetP6_12: P6.12 SJ12.2 | length 143.3
  Top Layer w6: SJ12.2 P6.12
NetP6_13: P6.13 SJ19.2 | length 143.3
  Top Layer w6: SJ19.2 P6.13
NetP7_1: P7.1 SJ20.2 | length 145.9
  Top Layer w6: SJ20.2 5900,1228.7 5900,1365.6 P7.1
NetP7_2: P7.2 SJ21.2 | length 143.3
  Top Layer w6: SJ21.2 P7.2
NetP7_3: P7.3 SJ22.2 | length 143.3
  Top Layer w6: SJ22.2 P7.3
NetP7_4: P7.4 SJ23.2 | length 143.3
  Top Layer w6: SJ23.2 P7.4
NetP7_5: P7.5 SJ24.2 | length 143.3
  Top Layer w6: SJ24.2 P7.5
NetP7_6: P7.6 SJ26.2 | length 143.3
  Top Layer w6: SJ26.2 P7.6
NetP7_7: P7.7 SJ27.2 | length 143.3
  Top Layer w6: SJ27.2 P7.7
NetP7_8: P7.8 SJ28.2 | length 143.3
  Top Layer w6: SJ28.2 P7.8
NetP7_9: P7.9 SJ29.2 | length 143.3
  Top Layer w6: SJ29.2 P7.9
NetP7_10: P7.10 SJ30.2 | length 143.3
  Top Layer w6: SJ30.2 P7.10
NetP7_11: P7.11 SJ31.2 | length 143.5
  Top Layer w6: P7.11 6902.95,1225.75 SJ31.2
NetP8_1: P8.1 P9.1 SJ18.2 | length 372
  Top Layer w10: 4636.22,1037.4 SJ18.2 P8.1 P9.1
NetP8_2: P8.2 P9.2 SJ17.2 | length 372
  Top Layer w10: 4636.22,937.4 SJ17.2 P8.2 P9.2
NetP8_3: P8.3 P9.3 SJ16.2 | length 372
  Top Layer w10: 4636.22,837.4 SJ16.2 P8.3 P9.3
NetP8_4: P8.4 P9.4 SJ15.2 | length 372
  Top Layer w10: 4636.22,737.4 SJ15.2 P8.4 P9.4
NetP8_5: P8.5 P9.5 SJ14.2 | length 272
  Top Layer w10: SJ14.2 P8.5 P9.5
NetP8_6: P8.6 P9.6 SJ13.2 | length 272
  Top Layer w10: SJ13.2 P8.6 P9.6
NetRIGHT_1: RIGHT.1 RIGHT.2 RIGHT_TP.2 | length 1816.5
  Top Layer w6: RIGHT_TP.2 2068.14,1300 2089.12,1320.98 2629.02,1320.98 2878.74,1071.26 RIGHT.2 RIGHT.1
NetSJ25_2: SJ25.2 U1.1 | length 165
  Top Layer w5: SJ25.2@176.49,322.38 U1.1
NetSJ33_2: SJ33.2 U1.2 | length 165.5
  Top Layer w5: SJ33.2 276.49,324.03 U1.2
NetSJ35_2: SJ35.2 U1.3 | length 164.8
  Top Layer w5: SJ35.2@376.49,322.56 U1.3
NetSJ39_2: SJ39.2 U1.5 | length 165.5
  Top Layer w5: U1.5 578.02,485.87 SJ39.2
NetSJ41_2: SJ41.2 U1.6 | length 165.9
  Top Layer w5: U1.6 679.02,484.87 SJ41.2
NetSJ45_1: SJ45.1 U6.4 | length 147.4
  Top Layer w5: U6.4@3829.53,690.94 3963.13,690.94 SJ45.1
NetU2_4: U2.4 U3.2 | length 332.8
  Top Layer w6: U2.4@3229.53,690.94 3235,685.47 3235,543.74 3356.3,422.44 U3.2@3368.11,422.44
NetU3_4: U3.4 U4.2 | length 296
  Top Layer w6: U4.2@3368.11,722.44 3434.77,722.44 3534.5,622.71 3534.5,567.08 3549.21,552.36 U3.4@3561.02,552.36
NetU4_4: U4.4 U5.2 | length 263.8
  Top Layer w6: U5.2@3368.11,1022.44 3379.92,1022.44 3394.64,1007.72 3394.64,1006.94 3549.21,852.36 U4.4@3561.02,852.36
NetU5_4: U5.4 U6.2 | length 364.9
  Top Layer w5: U5.4@3561.02,1152.36 3627.64,1152.36 3699.61,1080.39 U6.2@3699.61,883.86
NetUP_1: UP.1 UP.2 UP_TP.2 | length 1079.7
  Top Layer w6: UP_TP.2 2084.81,1200 2099.3,1185.51 2334.96,1185.51 UP.2@2374.02,1146.46 ; UP.2 UP.1
PWR: C2.1 C4.1 P3.1 P3.2 P3.3 P3.4 P10.1 P10.2 P10.3 P10.4 R1.1 SJ16.1 SJ32.2 SJ34.1 U2.3 U3.3 U4.3 U5.3 U6.3 | length 7698.2
  Top Layer w15: U2.3@3099.61,690.94 3106.68,698.02 3106.68,732.94 3143.74,770 3235.66,770 3273.28,732.38 3273.28,671.72 3319.46,625.54 3412.86,625.54 3469.21,569.19 3469.21,514.25 3561.02,422.44 3647.43,508.85 ; SJ34.1 SJ32.2 ; C4.1 3537.53,1306.44 3521.3,1322.67 3518.63,1322.67 3502.57,1338.72 3419.64,1338.72 SJ32.2 ; U4.3@3561.02,722.44 3620.47,722.44 3651.97,690.94 U6.3@3699.61,690.94 ; 3648.49,509.91 3699.95,509.91 ; 3650.7,692.22 3650.7,932.77 3583.05,1000.41 3583.05,1012.22 3572.83,1022.44 3561.02,1022.44 3561.02,1087.44 3418.37,1230.1 SJ32.2 ; U6.3@3699.95,690.6 3699.95,509.91 ; SJ16.1 4479.51,838.84 4291.7,838.84 3962.77,509.91 ; R1.1@7000,1335.43 7000,1439.33 6996.31,1443.01 ; C2.1 7100,1397.76 ; P3.1 P3.2 P3.3 P3.4 7197.76,1300 7100,1397.76 ; 3699.95,509.91 3962.77,509.91 ; 3962.77,509.91 4190.09,509.91 4259.94,440.06 5057.29,440.06 5190,572.77 5190,1090 P10.4 P10.3 P10.2 P10.1 5773.01,1373.01 5789.45,1373.01 5859.45,1443.01 6996.31,1443.01 ; 6996.31,1443.01 7054.75,1443.01 7097.96,1399.8 7100,1397.76
RIGHT_TP: RIGHT_TP.1 SJ40.1 U1.10 | length 995.7
  Top Layer w5: U1.10 576.49,1216.49 660,1300 1140,1300 v1(1170,1270) 1170,1230.98 SJ40.1@1170.98,1230 ; v1(1287.07,1300) RIGHT_TP.1
  Bottom Layer w5: v1(1170,1270) 1200,1300 v1(1287.07,1300)
RTN: C1.2 C2.2 C3.2 C4.2 CENTER.3 CENTER.4 D1.1 D2.1 DOWN.3 DOWN.4 J1.1 J1.S1 J1.S2 LEFT.3 LEFT.4 P5.1 P5.2 P5.3 P5.4 P12.1 P12.2 P12.3 P12.4 RIGHT.3 RIGHT.4 SJ17.1 TP3.1 TP4.1 U1.13 U2.1 U3.1 U4.1 U5.1 U6.1 UP.3 UP.4
  other v1: 1789.18,48.75 3823.5,48.75 5829.18,48.75 1803.07,84.75 3808.86,84.75 5828.86,84.75 1819.27,120.29 3822.75,120.75 5842.75,120.75 3838.95,156.29 5858.95,156.29 1881.36,228.25 3901.36,228.25 5921.36,228.25 2766.69,263.75 3901.03,264.25 4786.69,263.75 5921.03,264.25 2766.37,299.75 4786.37,299.75 6806.37,299.75 2599.11,300.75 4619.11,300.75 2598.79,336.75 2638.42,336.75 4618.79,336.75 4658.42,336.75 6638.79,336.75 7847.55,354.92 2638.1,372.75 4658.1,372.75 4746.46,372.75 6678.1,372.75 6765,405 4746.14,408.75 2730,425 2319.39,430.16 2727.77,445.41 7834.84,448.02 2820,475 3415,485 7835,550 7045,565 2760,580 2160,585 7835,645 2380,670 2665,670 7000,800 7840,950 2800,985 2160,994.34 3260,1020 2320,1030 2720,1040 6999.07,1057.59 5165.32,1160.26 7100,1200 1130.37,1244.38 3648.56,1302.23 882.44,1320.94 5387.28,1337.11 3929.07,1354.9 420,1395 7625.21,1398.58 886.49,1417.5 950.63,1442.31 359.37,1474.39 3493.77,1474.41 255,1485 7400,1500 3674.74,1522.07
  other v2: 3728.82,1522.56 3949.29,1522.56
UP_TP: SJ42.1 U1.9 UP_TP.1 | length 895.3
  Top Layer w5: U1.9 676.49,1216.49 720,1260 1030,1260 v1(1110,1180) SJ42.1@1110,1140 ; v1(1287.07,1200) UP_TP.1
  Bottom Layer w5: v1(1110,1180) 1130,1200 v1(1287.07,1200)
pads on no net: J2.1 J2.2 J2.3 J2.A1 J2.A2 J2.A3 J2.A4 J2.A5 J2.A6 J2.A7 J2.B1 J2.B2 J2.B3 J2.B4 J2.B5 J2.B6 J2.B7 J2.C1 J2.C2 J2.C3 J2.C4 J2.C5 J2.C6 J2.C7 MH5.1 MH6.1 MH7.1 MH8.1 MH9.1 MH10.1 SJ1.1 SJ2.1 SJ3.1 SJ4.1 SJ5.1 SJ6.1 SJ7.1 SJ8.1 SJ9.1 SJ10.1 SJ11.1 SJ12.1 SJ13.1 SJ18.1 SJ19.1 SJ20.1 SJ21.1 SJ22.1 SJ23.1 SJ24.1 SJ26.1 SJ27.1 SJ28.1 SJ29.1 SJ30.1 SJ31.1 SJ45.2

## Polygon pours and split planes (outlines as drawn)
RTN on Bottom Layer "BOT_GND" (solid, remove dead copper, pour order 5): -39.37,-1.01 8582.68,-1.01 8583.7,0 8583.7,1574.8 8582.67,1575.82 959.68,1575.82 958.63,1574.8 cw(c905.52,1574.8) 852.4,1574.8 851.38,1575.82 -40.39,1575.82
RTN on Top Layer "TOP_GND" (solid, remove dead copper, pour order 4): -38.35,-1.01 8582.68,-1.01 8583.7,0 8583.7,1574.8 8582.67,1575.82 959.68,1575.82 958.63,1574.8 cw(c905.52,1574.8) 852.4,1574.8 851.38,1575.82 -39.37,1575.82

## Other copper
Top Layer:
  pour cut-out: 4676.24,1085.1 4676.24,489.71 4539.51,489.71 4539.51,1085.1
  pour cut-out: 1403.27,1447.7 1540,1447.7 1540,852.3 1403.27,852.3
  pour cut-out: 8158.22,1547.24 8298.86,1547.24 8298.86,248.67 8158.22,248.67
  pour cut-out: 6950.88,1165.52 6950.88,1025.66 6950.1,1024.89 5852.6,1024.89 5852.6,1165.52

## Silkscreen, mask and mechanical layers (free items; w line width, h text height)
Top Overlay:
  drawing of 423 lines, arcs and shapes, not listed
  text "3V3" at 1160.05,1526.17 h39.37
  text "Keep your friends close  / and your return closer." at 1300,1500 h78.74
  text "13" at 8415.64,1488.22 h39.37
  text "5V" at 1194.94,1475.13 h39.37
  text "BAT+" at 140,1470 h39.37
  text ".Print_Date" at 4714.59,1461.09 h125
  text "Breakout Boards" at 6140.49,1440.21 h78.74
  text "3V3" at 2990.77,1425.14 h78.74
  text "3V3" at 5265.77,1425.14 h78.74
  text "RTN" at 1163.29,1402.02 h39.37
  text "12" at 8415.3,1387.98 h39.37
  text "BAT-" at 140,1385 h39.37
  text "PWR" at 3462.15,1374.8 h78.74
  text "3V3" at 7652.99,1374.62 h78.74
  text ".ProjectRevision" at 4870.74,1343.68 h125
  text "PWR" at 5227.15,1324.8 h78.74
  text "5V" at 3007.44,1315.21 h78.74
  text "11" at 8416.66,1288.18 h39.37
  text "D10" at 7606.98,1276.92 h78.74
  text "5V" at 188.02,1242.71 h39.37 r90
  text "D9" at 588.28,1242.27 h39.37 r90
  text "D8" at 688.26,1242.17 h39.37 r90
  text "D7" at 788.26,1242.22 h39.37 r90
  text "3V3" at 388.26,1233.28 h39.37 r90
  text "RTN" at 288.26,1232.18 h39.37 r90
  text "D10" at 488.26,1231.97 h39.37 r90
  text "SCL" at 3791.78,1231.6 h39.37 r90
  text "SDA" at 3831.7,1231.6 h39.37 r90
  text "PWR" at 3870.79,1231.6 h39.37 r90
  text "RTN" at 3909.89,1231.6 h39.37 r90
  text "RTN" at 5251.54,1224.79 h78.74
  text "VERDANA FONT HEIGHT" at 2778.3,1221.69 h45.28
  text "D10" at 1212.55,1207.24 h39.37
  text "10" at 8415.33,1188.22 h39.37
  text "D9" at 7648.17,1177.13 h78.74
  text "/ 80mil" at 3028.3,1155.07 h80
  text "2.0mm" at 2778.3,1151.63 h78.74
  text "D9" at 1162.85,1108.21 h39.37
  text "/ 60mil" at 2958.3,1100.08 h60
  text "1.5mm" at 2778.3,1097.83 h59.06
  text "9" at 8433.32,1088.21 h39.37
  text "Screen" at 4490,1085.85 h78.74
  text "D8" at 7647.78,1077.16 h78.74
  text "/ 40mil" at 2908.3,1055.16 h40
  text "1.0mm" at 2778.3,1053.41 h39.37
  text "n.c." at 4361.3,1026.32 h39.37
  text "n.c." at 5067.2,1026.32 h39.37
  text "MORE INFO" at 5312.32,1025.59 h78.74
  text "Button TPs" at 1872.17,1019.27 h39.37 r90
  text "D8" at 1102.75,1017.24 h39.37
  text "8" at 8433.27,988.22 h39.37
  text "D7" at 7647.98,977.16 h78.74
  text "RTN" at 4361.3,923.43 h39.37
  text "RTN" at 5067.2,923.43 h39.37
  text "D7" at 1042.8,917.24 h39.37
  text "7" at 8433.88,888.22 h39.37
  text "D6" at 7647.42,882.79 h78.74
  text "PWR" at 7025.2,842.15 h78.74 r90
  text "PWR" at 4361.3,823.43 h39.37
  text "PWR" at 5067.2,823.43 h39.37
  text "D3" at 982.02,818.22 h39.37
  text "SCL" at 7570.46,793.46 h39.37
  text "6" at 8433.32,788.25 h39.37
  text "D5" at 7648.5,783.23 h78.74
  text "3V3" at 7324.86,780.77 h78.74 r90
  text "RTN" at 7425.21,766.54 h78.74 r90
  text "PWR" at 7225.2,742.15 h78.74 r90
  text "SCL" at 4361.3,723.43 h39.37
  text "SCL" at 5067.2,723.43 h39.37
  text "D6" at 920.69,717.27 h39.37
  text "SDA" at 7564.44,687.76 h39.37
  text "5" at 8434.65,688.47 h39.37
  text "Solder / Me / First" at 2404.73,687.25 h39.37
  text "Solder / Me / First" at 3349.61,687.25 h39.37
  text "D4" at 7647.06,682.74 h78.74
  text "BAT-" at 356.5,651.07 h31.5
  text "BAT+" at 430.89,651.07 h31.5
  text "SDA" at 4361.3,623.43 h39.37
  text "SDA" at 5067.2,623.43 h39.37
  text "4" at 8432.19,588.22 h39.37
  text "D3" at 7648.8,582.74 h78.74
  text "FR-4 εr ≈ 4.2" at 984.77,561.35 h78.74
  text "V=IR / P=IV" at 6991.79,547.01 h78.74
  text "n.c." at 4361.3,526.32 h39.37
  text "n.c." at 5067.2,526.32 h39.37
  text "3" at 8434.49,488.22 h39.37
  text "tpd ≈ 0.2 ns/in" at 950,486.89 h78.74
  text "D2" at 7648.11,482.24 h78.74
  text "(λg) wavelength" at 1660,427.07 h78.74
  text "2" at 8434.04,391.11 h39.37
  text "D1" at 7650.83,382.65 h78.74
  text "(tpd) time propagation delay" at 1390,336.99 h78.74
  text "Signals electrically long ≥ ~1/10 of the signal’s wavelength (λ)" at 4984.86,336.66 h78.74
  text "Assumes shared relativistic frame" at 3752.52,334.96 h78.74
  text "D0" at 144.68,304.76 h39.37 r90
  text "D1" at 246.18,304.76 h39.37 r90
  text "D2" at 347.18,304.76 h39.37 r90
  text "D3" at 459.51,304.9 h39.37 r90
  text "D4" at 549.18,304.76 h39.37 r90
  text "D5" at 649.68,304.76 h39.37 r90
  text "D6" at 759.51,304.21 h39.37 r90
  text "1" at 8437.26,288.18 h39.37
  text "RTN" at 45,284.58 h39.37 r90
  text "D0" at 7648.17,282.74 h78.74
  text "0.2ns" at 937.63,248.22 h39.37
  text "0.4ns" at 1918.5,248.31 h39.37
  text "0.6ns" at 2915.47,248.22 h39.37
  text "0.8ns" at 3913.66,248.31 h39.37
  text "1.0ns" at 4909.72,248.14 h39.37
  text "1.2ns" at 5909.37,248.28 h39.37
  text "1.4ns" at 6905.75,248.48 h39.37
  text "Breakout Boards" at 8015.69,194.93 h78.74
  text "2.4GHz / BLE" at 2280.63,162.63 h78.74
  text "0.9GHz / RFID" at 6255.63,162.83 h78.74
  text "5GHz / WiFi" at 1041.29,162.14 h78.74
Bottom Overlay:
  drawing of 920 lines, arcs and shapes, not listed
  text "BAT+" at 235.5,1469.32 h39.37
  text "3V3" at 5389.51,1437.57 h39.37
  text "BAT-" at 235.5,1384.32 h39.37
  text "PWR" at 7239.49,1366.92 h39.37
  text "3V3" at 7329.81,1367.1 h39.37
  text "RTN" at 7433.36,1366.92 h39.37
  text "PWR" at 5389.49,1337.4 h39.37
  text "D10" at 7731.72,1276.21 h78.74
  text "RTN" at 5389.49,1237.47 h39.37
  text "D9" at 7731.72,1176.42 h78.74
  text "D8" at 7731.72,1076.45 h78.74
  text "n.c." at 4840.85,1030.26 h39.37
  text "D7" at 7731.72,976.45 h78.74
  text "RTN" at 4840.85,927.36 h39.37
  text "D6" at 7731.72,882.07 h78.74
  text "PWR" at 4840.85,827.37 h39.37
  text "SCL" at 7630.85,794.43 h39.37
  text "D5" at 7731.72,782.52 h78.74
  text "SCL" at 4840.85,727.36 h39.37
  text "SDA" at 7630.85,688.73 h39.37
  text "D4" at 7731.72,682.03 h78.74
  text "BAT-" at 415.16,651.07 h31.5
  text "BAT+" at 498.25,651.07 h31.5
  text "SDA" at 4840.85,627.36 h39.37
  text "D3" at 7731.72,582.03 h78.74
  text "n.c." at 4840.85,530.26 h39.37
  text "D2" at 7731.72,481.53 h78.74
  text "D1" at 7731.72,381.94 h78.74
  text "D0" at 7731.72,282.03 h78.74
Board outline (optional, doesn't get exported!):
  lines w7.87: 8582.68,1377.95 8582.68,0 ; -39.37,0 8582.68,0 ; -39.37,0 8582.68,0 ; -39.37,0 -39.37,1574.8 851.38,1574.8 ccw(c905.52,1574.8) 959.65,1574.8 8582.68,1574.8 8582.68,0
Screen:
  drawing of 9 lines, arcs and shapes, not listed
Sheet:
  lines w2: -477.26,575.8 782.58,575.8 ; -958.75,-999 -958.75,-959.62 -950.87,-959.62 -950.87,-999 -958.75,-999 ; -896.25,-999 -896.25,-959.62 -888.37,-959.62 -888.37,-999 -896.25,-999 ; -833.75,-999 -833.75,-959.62 -825.87,-959.62 -825.87,-999 -833.75,-999 ; -771.25,-999 -771.25,-959.62 -763.37,-959.62 -763.37,-999 -771.25,-999 ; -729.81,-319.45 -729.81,18.05 -392.31,18.05 -392.31,-319.45 -729.81,-319.45 ; -708.75,-999 -708.75,-959.62 -700.87,-959.62 -700.87,-999 -708.75,-999 ; -646.25,-999 -646.25,-959.62 -638.37,-959.62 -638.37,-999 -646.25,-999 ; -583.75,-999 -583.75,-959.62 -575.87,-959.62 -575.87,-999 -583.75,-999 ; -521.25,-999 -521.25,-959.62 -513.37,-959.62 -513.37,-999 -521.25,-999 ; -458.75,-999 -458.75,-959.62 -450.87,-959.62 -450.87,-999 -458.75,-999 ; -396.25,-999 -396.25,-959.62 -388.37,-959.62 -388.37,-999 -396.25,-999 ; -333.75,-999 -333.75,-959.62 -325.87,-959.62 -325.87,-999 -333.75,-999 ; -271.25,-999 -271.25,-959.62 -263.37,-959.62 -263.37,-999 -271.25,-999 ; -208.75,-999 -208.75,-959.62 -200.87,-959.62 -200.87,-999 -208.75,-999 ; -146.25,-999 -146.25,-959.62 -138.37,-959.62 -138.37,-999 -146.25,-999 ; -83.75,-999 -83.75,-959.62 -75.87,-959.62 -75.87,-999 -83.75,-999 ; -21.25,-999 -21.25,-959.62 -13.37,-959.62 -13.37,-999 -21.25,-999
Mechanical 25:
  circle w10: c1996.47,944.89 r49.21
  circle w10: c905.52,314.96 r49.21
  circle w10: c1231.5,357.87 r49.21
  circle w10: c1535.44,483.86 r49.21
  circle w10: c1796.46,683.86 r49.21
  circle w10: c2122.45,1248.82 r49.21
  circle w10: c905.52,1574.8 r49.21

## Text inside footprints (layer, text, board x,y; h text height)
J2: Top Overlay "0.7 mm pad height" at 6940.53,529.75 h35 r90; Top Overlay "q" at 6640.18,855.51 h35; Top Overlay "n" at 6566.45,849.75 h35; Top Overlay "o" at 6590.34,850.19 h35; Top Overlay "p" at 6615.61,855.51 h35; Top Overlay "r" at 6664.75,849.75 h35; Top Overlay "s" at 6685.3,850.13 h35; Top Overlay "t" at 6708.35,850.06 h35; Top Overlay "u" at 6729,850.19 h35; Top Overlay "v" at 6752.89,849.75 h35; Top Overlay "w" at 6778.98,849.75 h35; Top Overlay "x" at 6810.87,849.75 h35; Top Overlay "y" at 6836.97,855.51 h35; Top Overlay "z" at 6863.06,849.75 h35; Top Overlay "7" at 5871.45,509.75 h35; Top Overlay "2" at 5871.45,759.75 h35; Top Overlay "3" at 5871.45,710.19 h35; Top Overlay "1" at 5871.45,809.75 h35; Top Overlay "A" at 5905.38,849.04 h35; Top Overlay "B" at 5955.38,849.04 h35; Top Overlay "C" at 6005.38,849.42 h35; Top Overlay "D" at 6055.38,849.04 h35; Top Overlay "E" at 6105.38,849.04 h35; Top Overlay "F" at 6155.38,849.04 h35; Top Overlay "G" at 6205.38,849.45 h35; Top Overlay "H" at 6255.38,849.04 h35; Top Overlay "I" at 6305.38,849.04 h35; Top Overlay "J" at 6355.38,849.33 h35; Top Overlay "K" at 6405.38,849.04 h35; Top Overlay "L" at 6455.38,849.04 h35; Top Overlay "M" at 6505.38,849.04 h35; Top Overlay "4" at 5871.45,659.75 h35; Top Overlay "5" at 5871.45,610.19 h35; Top Overlay "6" at 5871.45,560.19 h35; Top Overlay "50 mil pitch" at 6131.45,460.51 h35; Top Overlay "25 mil pitch" at 6621.45,460.51 h35
U1: 3D Bodies Top "JP2" at 836.49,1112.4 h54.25 r270; 3D Bodies Top "JP1" at 836.49,537.4 h54.25 r270